# Altium PCB AQFlow_PCB.PcbDoc
Units mil, origin at the board's own origin, x right, y up, seen from the top; angles counter-clockwise.
Board outline 5485 x 2945 mil, 2 copper layers (Top Layer, Bottom Layer); 66 components, 69 nets, 294 pads, 0 vias.
Unrouted connection lines stored in the file: 113.
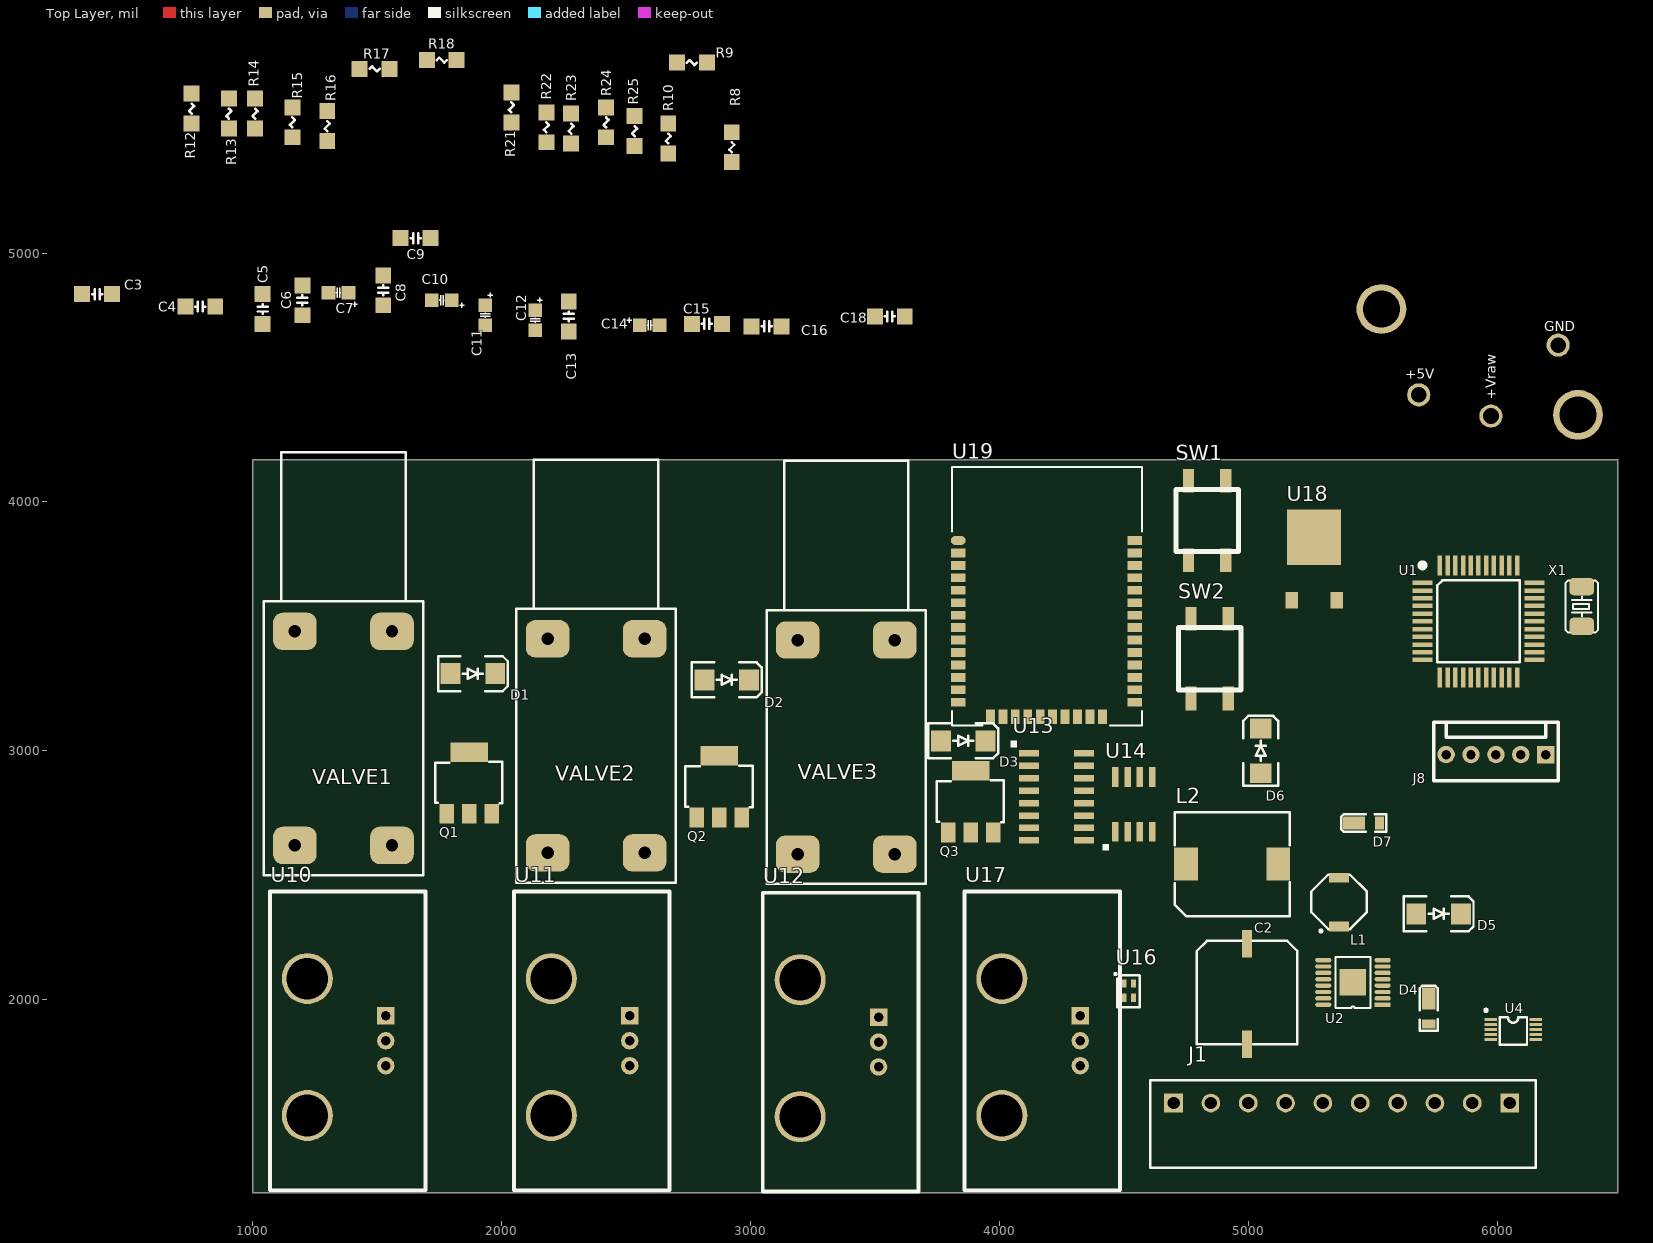
[diagram p0: Top Layer view]
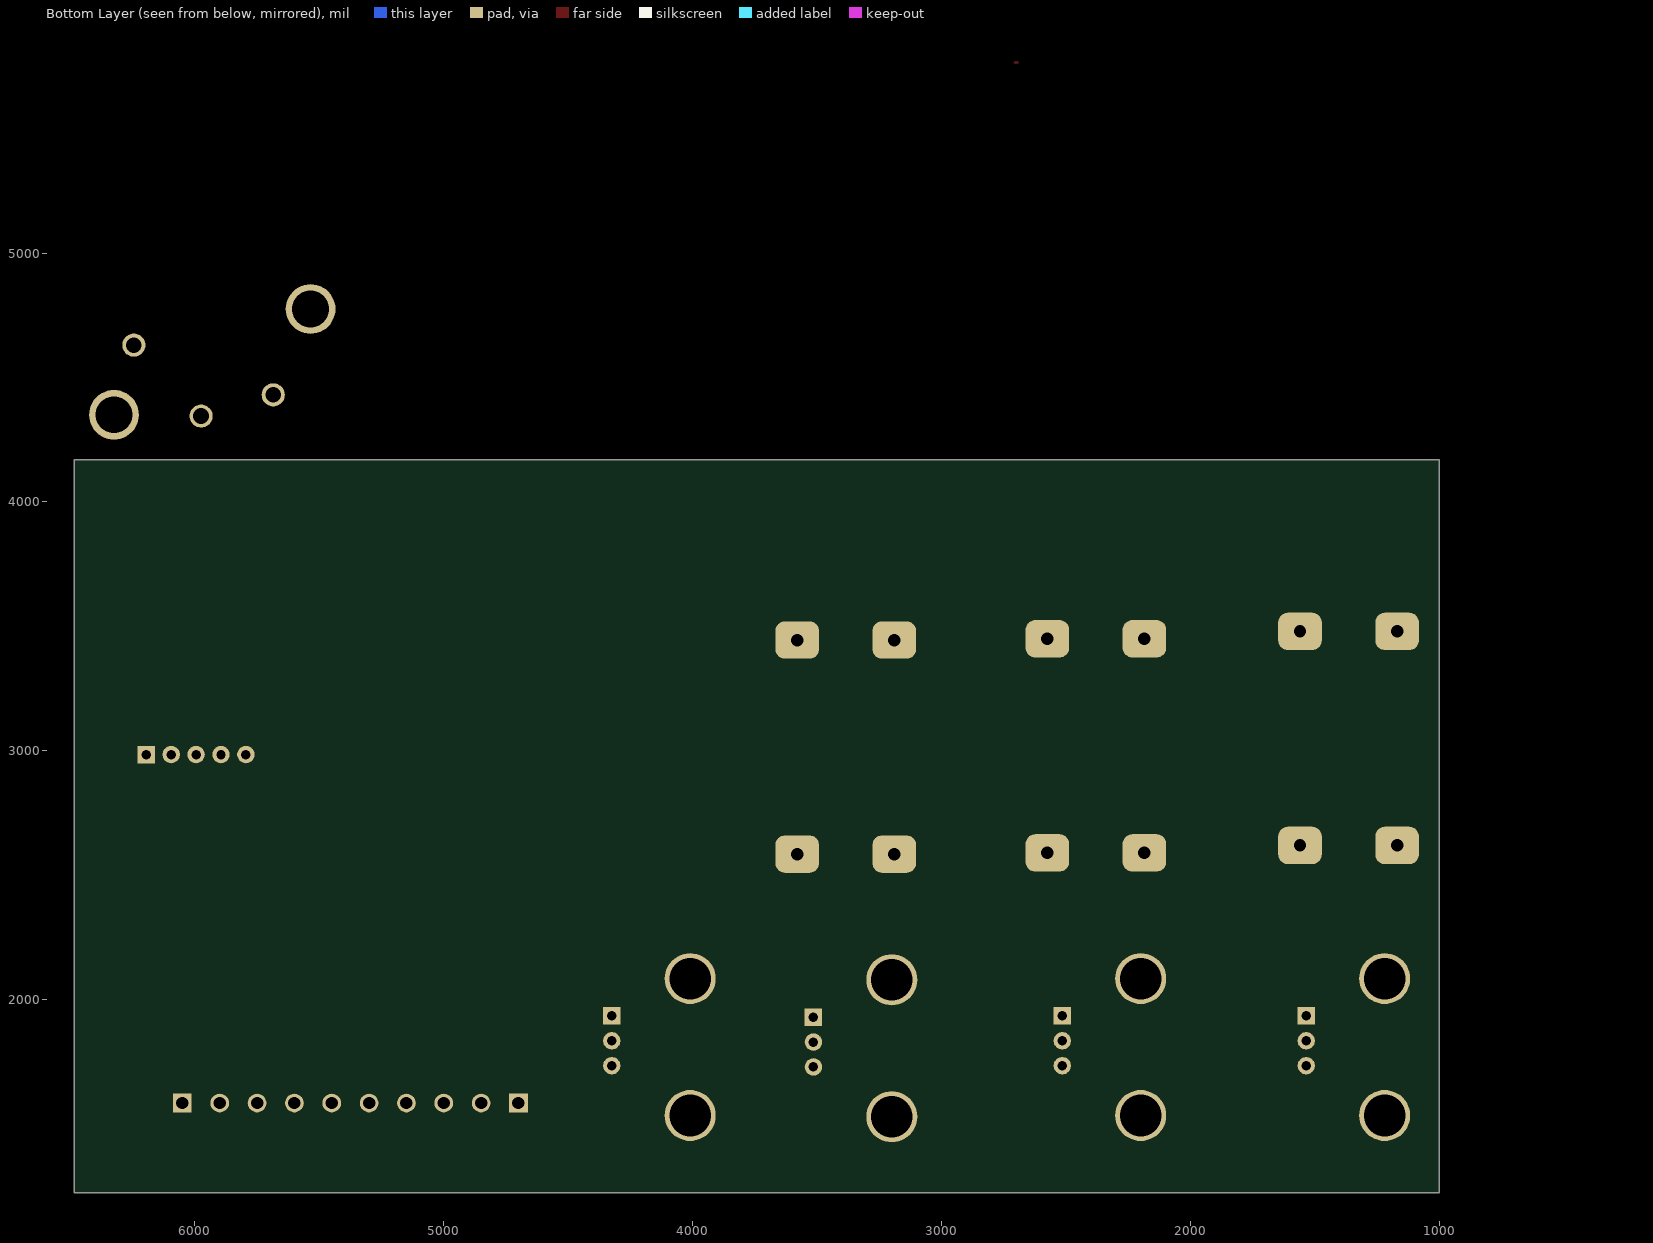
[diagram p1: Bottom Layer view, seen from below]

## Layer stack, top to bottom
Top Solder: solder mask 0.4, Solder Resist, Dk 3.5
Top Layer: signal copper 1.4
Dielectric1: dielectric 12.6, FR-4, Dk 4.8
Bottom Layer: signal copper 1.4
Bottom Solder: solder mask 0.4, Solder Resist, Dk 3.5

## Board outline
1000,1225 6485,1225 6485,4170 1000,4170

## Design rules (kind name [scope] priority, off if disabled: settings)
Clearance [All] p1: gap=6 ignorepadtopadclearanceinfootprint=FALSE except(0: Arc-Hole Track-Hole SMDPad-Hole THPad-Hole Via-Hole Fill-Hole Poly-Hole Region-Hole Text-Hole)
PolygonConnect [All] p1: connectstyle=Relief reliefconductorwidth=10 reliefentries=4 polygonreliefangle="90 Angle" airgapwidth=10
RoutingVias [All] p1: holewidth=28 width=50 viastyle="Through Hole" minholewidth=12 minwidth=30 maxholewidth=28 maxwidth=50
SolderMaskExpansion [All] p1: expansion=4 istentingtop=FALSE
Width [All] p1: maxlimit=100 minlimit=6 preferedwidth=10
30 further rules are at their usual default settings.

## Classes and differential pairs
component class BLE: R? SW1 SW2 U19 U?
component class "Valve ControlB": D1 D2 D3 Q1 Q2 Q3 R10 U10 U11 U12 U13 U14 U17 VALVE1 VALVE2 VALVE3
component class Power: +5V +Vraw C2 C3 C4 C5 C6 C7 C8 D5 D6 D7 GND J1 L1 L2 R8 R9 R12 R13 R14 R21 R22 U2 U18
component class PIC: C9 C10 C11 C12 C13 C14 C15 C16 C18 J8 R15 R16 R17 R18 R23 R24 R25 U1 U4 U16 X1

## Components (designator, comment, footprint, x,y, rotation, side; value= is the part's Value field where it differs from the comment)
+5V "+3.3V" PAD_TESTPOINT 5685,4430 r90 top
+Vraw "+Vraw" PAD_TESTPOINT 5975,4345 r90 top
C2 "CAP_POL_Alu" Cap_Alu_UCL1V221MCL6GS 4995,2225 r0 top
C3 "CC1206" CC1206 375,4835 r0 top value=4.7uF
C4 "CC1206" CC1206 790,4785 r180 top value=0.1uF
C5 "CC1206" CC1206 1040,4775 r270 top value=220pF
C6 "CC1206" CC1206 1200,4810 r90 top value=22uF
C7 "CAP_POL_0805 Generic" Cap_Pol_0805 1345,4840 r180 top
C8 "" CC1206 1525,4850 r90 top value=0.1uF
C9 "CC1206" CC1206 1655,5060 r180 top value=0.1uF
C10 "Cap_Pol_0805" Cap_Pol_0805 1760,4810 r180 top
C11 "Cap_Pol_0805" Cap_Pol_0805 1935,4750 r270 top
C12 "Cap_Pol_0805" Cap_Pol_0805 2135,4730 r270 top
C13 "CC1206" CC1206 2270,4745 r270 top value=0.1uF
C14 "CAP_POL_0805 Generic" Cap_Pol_0805 2595,4710 r0 top
C15 "CC1206" CC1206 2825,4715 r180 top value=22pF
C16 "CC1206" CC1206 3065,4705 r180 top value=22pF
C18 "CC1206" CC1206 3560,4745 r0 top value=0.1uF
D1 "DIODE_PWR" SMB_DIODE_PWR(Primary) 1885,3310 r180 top value={Value}
D2 "DIODE_PWR" SMB_DIODE_PWR(Primary) 2905,3285 r180 top value={Value}
D3 "DIODE_PWR" SMB_DIODE_PWR(Primary) 3855,3040 r180 top value={Value}
D4 "PD3S0230DICT" POWERDI123 5725,1960 r270 top
D5 "PD3S0230DICT" SMB_DIODE_PWR(Primary) 5765,2345 r180 top
D6 "DFLS230LDICT" SMB_DIODE_PWR(Primary) 5050,3000 r270 top
D7 "DFLS230LDICT" POWERDI123 5470,2710 r0 top
GND "GND" PAD_TESTPOINT 6244.99,4630 r90 top
J1 "TERM_BLOCK_10" "Terminal Block 10 Pos" 4700,1585 r0 top
J8 "HDR_MTA_5X100" HDR_MTA_5X100 6045,2985 r0 top
L1 "Inductor" Inductor_Small 5365,2295 r90 top value=3.3uH
L2 "Inductor" 7447798111 4750,2545 r0 top value=11uH
Q1 "ZVN4306" "TO-261-4 - ZVN4306GCT" 1960.55,2746.97 r180 top value={Value}
Q2 "ZVN4306" "TO-261-4 - ZVN4306GCT" 2965.55,2731.97 r180 top value={Value}
Q3 "ZVN4306" "TO-261-4 - ZVN4306GCT" 3975.55,2671.97 r180 top value={Value}
R8 "RC1206" RC1206 2925,5425 r90 top value=10k
R9 "RC1206" RC1206 2765,5765 r180 top value=100k
R10 "RC1206" RC1206 2670,5460 r270 top value=10k
R12 "RC1206" RC1206 755,5580 r90 top value=31.6k
R13 "RC1206" RC1206 905,5560 r270 top value=10k
R14 "RC1206" RC1206 1010,5560 r270 top value=10k
R15 "RC1206" RC1206 1160,5525 r270 top value=0
R16 "RC1206" RC1206 1300,5510 r270 top value=0
R17 "RC1206" RC1206 1490,5740 r180 top value=100
R18 "RC1206" RC1206 1760,5775 r0 top value=10k
R21 "RC1206" RC1206 2040,5585 r270 top value=10k
R22 "RC1206" RC1206 2180,5505 r270 top value=120k
R23 "RC1206" RC1206 2280,5500 r270 top value=1k
R24 "RC1206" RC1206 2420,5525 r270 top value=1k
R25 "RC1206" RC1206 2535,5490 r270 top value=1k
SW1 "SW_STMW_660" SW_STMW_660 4835,3925 r0 top
SW2 "SW_STMW_660" SW_STMW_660 4845,3370 r0 top
U1 "PIC18F47J53" 44-TQFP 5925,3520 r180 top
U2 "LT3506" "TSSOP16 Bottom Pad" 5530,1980 r180 top
U4 "Max 3313" uSOP 5955,1920 r0 top
U10 "AWM3000FM_1" AWM3000FM 1535,1835 r90 top
U11 "AWM3000FM_2" AWM3000FM 2515,1835 r90 top
U12 "AWM3000FM_3" AWM3000FM 3515,1830 r90 top
U13 "CD4051" SO16 4120,2990 r0 top
U14 "TLC2262" SO8 4465,2675 r90 top
U16 "RGB-LED_LITE-ON" LTST-C19HE1WT 4500,2065 r0 top
U17 "AWM3000FM_4" AWM3000FM 4325,1835 r90 top
U18 "LP2950_FLAT" TO-252 5175,3605 r0 top
U19 "ESP-WROOM-32" ESP-WROOM-32 3835,3845 r0 top
VALVE1 "SOLENOID_VALVE" SOLENOID_VALVE 1365,3050 r270 top
VALVE2 "SOLENOID_VALVE" SOLENOID_VALVE 2380,3020 r270 top
VALVE3 "SOLENOID_VALVE" SOLENOID_VALVE 3385,3015 r270 top
X1 "12MHz" XTAL_MINI_ABM3 6340,3580 r270 top

## Footprints (in the part's own frame and the unit in brackets; to place one, negate y for a bottom-side part, rotate by r counter-clockwise, add the part's x,y. Pads: shape width x height; smd on the part's side, far side on the other; paste and mask are expansions set on the pad)
44-TQFP [mil]
  rect 80x18 smd: 1(225,-155) 2(225,-124) 3(225,-93) 4(225,-62) 5(225,-31) 6(225,0) 7(225,31) 8(225,62) 9(225,93) 10(225,124) 11(225,155) 23(-225,155) 24(-225,124) 25(-225,93) 26(-225,62) 27(-225,31) 28(-225,0) 29(-225,-31) 30(-225,-62) 31(-225,-93) 32(-225,-124) 33(-225,-155)
  rect 18x80 smd: 12(155,225) 13(124,225) 14(93,225) 15(62,225) 16(31,225) 17(0,225) 18(-31,225) 19(-62,225) 20(-93,225) 21(-124,225) 22(-155,225) 34(-155,-225) 35(-124,-225) 36(-93,-225) 37(-62,-225) 38(-31,-225) 39(0,-225) 40(31,-225) 41(62,-225) 42(93,-225) 43(124,-225) 44(155,-225)
  silkscreen extent -165,-235 235,165
7447798111 [mm] "Inductor for 10.5V line"
  rect 2.4x3.4 smd: 1(0,0) 2(9.398,0)
  silkscreen extent -1.17,-5.31 10.59,5.31
AWM3000FM [mil]
  round 70 hole 38: 1(-100,0) 2(0,0)
  rect 70x70 hole 38: 3(100,0)
  round 205 hole 167: 4(-300,315) 5(250,315)
  silkscreen extent -600,-160 600,465
Cap_Alu_UCL1V221MCL6GS [mil]
  rect 39.37x110 smd: minus(0,-404) plus(0,0)
  silkscreen extent -202,-404 202,12
Cap_Pol_0805 [mil]
  rect 55x55 smd: minus(40,0) plus(-40,0)
  silkscreen extent -75,-20 10,55
CC1206 [mil]
  rect 64x64 smd: 1(-60,0) 2(60,0)
  silkscreen extent -20,-20 20,20
ESP-WROOM-32 [mm]
  oval 1.5x0.9 smd: 1(0,0)
  rect 1.5x0.9 smd: 2(0,-1.27) 3(0,-2.54) 4(0,-3.81) 5(0,-5.08) 6(0,-6.35) 7(0,-7.62) 8(0,-8.89) 9(0,-10.16) 10(0,-11.43) 11(0,-12.7) 12(0,-13.97) 13(0,-15.24) 14(0,-16.51) 25(18,-16.51) 26(18,-15.24) 27(18,-13.97) 28(18,-12.7) 29(18,-11.43) 30(18,-10.16) 31(18,-8.89) 32(18,-7.62) 33(18,-6.35) 34(18,-5.08) 35(18,-3.81) 36(18,-2.54) 37(18,-1.27) 38(18,0)
  rect 0.9x1.5 smd: 15(3.28,-18) 16(4.55,-18) 17(5.82,-18) 18(7.09,-18) 19(8.36,-18) 20(9.63,-18) 21(10.9,-18) 22(12.17,-18) 23(13.44,-18) 24(14.71,-18)
  Top Overlay keep-out region: 5.7,-6 9.2,-6 9.2,-9.5 5.7,-9.5
  silkscreen extent -0.65,-18.86 18.75,7.5
HDR_MTA_5X100 [mil]
  rect 70x70 hole 38: 1(150,0)
  round 70 hole 38: 2(50,0) 3(-50,0) 4(-150,0) 5(-250,0)
  silkscreen extent -300,-105 200,130
Inductor_Small [mil]
  rect 40x80 smd: 1(0,0) 2(195,0)
  silkscreen extent -24,-112 208,112
LTST-C19HE1WT [mil] "LED RGB CHIP SMD"
  rect 20x33.5 smd: 1(0,0) 2(40,0) 3(40,-57.5) 4(0,-57.5)
  silkscreen extent -37,-96 65,42
PAD_TESTPOINT [mil]
  round 93 hole 63: TP(0,0)
POWERDI123 [mil]
  rect 36x54 smd: A(58,0)
  rect 90x54 smd: K(-45,0)
  silkscreen extent -97,-36 84,36
RC1206 [mil]
  rect 64x64 smd: 1(-60,0) 2(60,0)
  silkscreen extent -20,-10 20,10
SMB_DIODE_PWR(Primary) [mil]
  rect 80x85 smd: A(90,0) K(-90,0)
  silkscreen extent -140,-70 140,70
SO8 [mil]
  rect 80x26 smd: 1(0,0) 2(0,-50) 3(0,-100) 4(0,-150) 5(220,-150) 6(220,-100) 7(220,-50) 8(220,0)
  silkscreen extent -75,25 -50,50
SO16 [mil]
  rect 80x26 smd: 1(0,0) 2(0,-50) 3(0,-100) 4(0,-150) 5(0,-200) 6(0,-250) 7(0,-300) 8(0,-350) 9(220,-350) 10(220,-300) 11(220,-250) 12(220,-200) 13(220,-150) 14(220,-100) 15(220,-50) 16(220,0)
  silkscreen extent -75,25 -50,50
SOLENOID_VALVE [mil]
  rrect50% 150x175 hole 50: 1(430,195) 2(430,-195) 3(-430,195) 4(-430,-195)
  silkscreen extent -1150,-320 550,320, body extent -1153,-325 551,324, height 700
SW_STMW_660 [mil]
  rect 45x95 smd: 1(-75,-160) 2(75,-160) 3(75,160) 4(-75,160)
  silkscreen extent -125,-125 125,125
"Terminal Block 10 Pos" [mil]
  rect 75x75 hole 50: 1(0,0) 10(1350,0)
  round 75 hole 50: 2(150,0) 3(300,0) 4(450,0) 5(600,0) 6(750,0) 7(900,0) 8(1050,0) 9(1200,0)
  silkscreen extent -93,-261 1456,92, body extent -96,-272 1458,94, height 114
TO-252 [mil]
  rect 51x67 smd: 1(0,0) 3(180,0)
  rect 217x224 smd: 2(90,253)
"TO-261-4 - ZVN4306GCT" [mm]
  rect 1.5x2 smd: D(2.3,0) G(4.6,0) S(0,0)
  rect 3.8x2 smd: D(2.3,-6.3)
  silkscreen extent -1.09,-5.31 5.77,-1.07
"TSSOP16 Bottom Pad" [mm]
  rect 1.651x0.45 smd: 1(-0.254,0)
  oval 1.651x0.45 smd: 2(-0.254,-0.65) 3(-0.254,-1.3) 4(-0.254,-1.95) 5(-0.254,-2.6) 6(-0.254,-3.25) 7(-0.254,-3.9) 8(-0.254,-4.55) 9(5.804,-4.55) 10(5.804,-3.9) 11(5.804,-3.25) 12(5.804,-2.6) 13(5.804,-1.95) 14(5.804,-1.3) 15(5.804,-0.65) 16(5.804,0)
  rect 2.74x2.74 smd: 17(2.794,-2.286)
  silkscreen extent 0.99,-4.88 4.57,0.33
uSOP [mil]
  rect 50x11.81 smd: 1(20,0) 2(20,-20) 3(20,-40) 4(20,-60) 5(20,-80) 6(200,-80) 7(200,-60) 8(200,-40) 9(200,-20) 10(200,0)
  silkscreen extent -6,-100 165,43
XTAL_MINI_ABM3 [mil]
  rrect50% 70x100 smd paste+1.97 mask+1.97: 1(-80,0) 2(80,0)
  silkscreen extent -105,-65 105,65

## Part data
+5V +Vraw GND: library part PAD, "Test Point"
C2: Capacitance=220µF, ESR (Equivalent Series Resistance)=-, Lifetime @ Temp.="2000 Hrs @ 105°C", Manufacturer=Nichicon, Manufacturer Part Number=UCL1V221MCL6GS, Operating Temperature="-55°C ~ 105°C", Package / Case="Radial, Can - SMD", Ripple Current=850mA, Supplier Part Number 1=493-3958-1-ND, Tolerance=±20%, Voltage Rating=35V, Applications="General Purpose", Category=Capacitors, ComponentLink1Description=http://nichicon-us.com/english/products/pdfs/e-cl.pdf, ComponentLink1URL=http://nichicon-us.com/english/products/pdfs/e-cl.pdf, Height - Seated (Max)="0.303\" (7.70mm)", Impedance="100 mOhm", Lead Spacing=-, Mounting Type="Surface Mount", Packaging="Cut Tape (CT)", Pricing 1="1=1.15, 10=0.962, 25=0.8292, 50=0.7778, 100=0.6141, 250=0.51176 (USD)", RoHS="RoHS Compliant", Size / Dimension="0.394\" Dia (10.00mm)", Stock 1=6274, Supplier 1=Digi-Key, Surface Mount Land Size="0.406\" L x 0.406\" W (10.30mm x 10.30mm)", Type=-
C7 C14: Capacitance=10µF, ESR (Equivalent Series Resistance)="6 Ohm", Lifetime @ Temp.=-, Manufacturer="Rohm Semiconductor", Manufacturer Part Number=TCTP1C106M8R, Manufacturer Size Code=P, Operating Temperature="-55°C ~ 125°C", Package / Case="0805 (2012 Metric)", Supplier Part Number 1=511-1683-2-ND, Tolerance=±20%, Voltage - Rated=16V, Category=Capacitors, ComponentLink1Description=http://rohmfs.rohm.com/en/products/databook/datasheet/passive/tantalum_capacitor/tantalum_chip_capacitor/tct_p.pdf, ComponentLink1URL=http://rohmfs.rohm.com/en/products/databook/datasheet/passive/tantalum_capacitor/tantalum_chip_capacitor/tct_p.pdf, Features="General Purpose", Height - Seated (Max)="0.047\" (1.20mm)", Lead Spacing=-, Mounting Type="Surface Mount", Packaging="Tape & Reel (TR)", Pricing 1="3000=0.2055, 6000=0.1918, 9000=0.18495, 15000=0.18221, 30000=0.1781, 75000=0.17468, 150000=0.16783 (USD)", RoHS="RoHS Compliant", Size / Dimension="0.079\" L x 0.049\" W (2.00mm x 1.25mm)", Stock 1=99000, Supplier 1=Digi-Key, Type=Molded
C8: library part CC1206, "CC1206"
C10 C11 C12: Capacitance=2.2µF, ESR (Equivalent Series Resistance)="6 Ohm", Lifetime @ Temp.=-, Manufacturer="AVX Corporation", Manufacturer Part Number=TAJR225K020RNJ, Manufacturer Size Code=R, Operating Temperature="-55°C ~ 125°C", Package / Case="0805 (2012 Metric)", Supplier Part Number 1=478-4693-1-ND, Tolerance=±10%, Voltage - Rated=20V, Category=Capacitors, ComponentLink1Description=http://www.avx.com/docs/Catalogs/tajlp.pdf, ComponentLink1URL=http://www.avx.com/docs/Catalogs/tajlp.pdf, Features="General Purpose", Height - Seated (Max)="0.047\" (1.20mm)", Lead Spacing=-, Mounting Type="Surface Mount", Packaging="Cut Tape (CT)", Pricing 1="1=1.24, 10=1.034, 100=0.66, 250=0.55, 500=0.495, 1000=0.451 (USD)", RoHS="RoHS Compliant", Size / Dimension="0.081\" L x 0.051\" W (2.05mm x 1.30mm)", Stock 1=9954, Supplier 1=Digi-Key, Type=Molded
D4 D5: Capacitance @ Vr, F="10.7pF @ 1V, 1MHz", Current - Average Rectified (Io)="200mA (DC)", Current - Reverse Leakage @ Vr="2µA @ 25V", Manufacturer="Diodes Incorporated", Manufacturer Part Number=PD3S0230-7, Operating Temperature - Junction="-65°C ~ 125°C", Package / Case="PowerDI™ 323", Supplier Part Number 1=PD3S0230DIDKR-ND, Voltage - DC Reverse (Vr) (Max)=30V, Voltage - Forward (Vf) (Max) @ If="800mV @ 100mA", Category="Discrete Semiconductor Products", ComponentLink1Description=http://www.diodes.com/datasheets/ds30722.pdf, ComponentLink1URL=http://www.diodes.com/datasheets/ds30722.pdf, Diode Type=Schottky, Mounting Type="Surface Mount", Packaging=Digi-Reel®, Pricing 1="1=0.49, 10=0.412, 25=0.3612, 100=0.309, 250=0.268, 500=0.227, 1000=0.175 (USD)", Reverse Recovery Time (trr)=5ns, RoHS="RoHS Compliant", Speed="Small Signal =< 200mA (Io), Any Speed", Stock 1=4247, Supplier 1=Digi-Key, Supplier Device Package="PowerDI™ 323"
D6 D7: Capacitance @ Vr, F="76pF @ 10V, 1MHz", Current - Average Rectified (Io)=2A, Current - Reverse Leakage @ Vr="1mA @ 30V", Manufacturer="Diodes Incorporated", Manufacturer Part Number=DFLS230L-7, Operating Temperature - Junction="-40°C ~ 125°C", Package / Case=POWERDI®123, Supplier Device Package="PowerDI™ 123", Supplier Part Number 1=DFLS230LDIDKR-ND, Voltage - DC Reverse (Vr) (Max)=30V, Voltage - Forward (Vf) (Max) @ If="420mV @ 2A", Category="Discrete Semiconductor Products", ComponentLink1Description=http://www.diodes.com/datasheets/ds30515.pdf, ComponentLink1URL=http://www.diodes.com/datasheets/ds30515.pdf, Diode Type=Schottky, Mounting Type="Surface Mount", Packaging=Digi-Reel®, Pricing 1="1=0.74, 10=0.65, 25=0.5744, 100=0.5004, 250=0.4356, 500=0.3708, 1000=0.297 (USD)", Reverse Recovery Time (trr)=-, RoHS="RoHS Compliant", Speed="Fast Recovery =< 500ns, > 200mA (Io)", Stock 1=8959, Supplier 1=Digi-Key
L1: Current - Saturation=2.1A, Current Rating=2.01A, DC Resistance (DCR)="45 mOhm Max", Frequency - Self Resonant=-, Frequency - Test=100kHz, Inductance=4.7µH, Manufacturer="Eaton Bussmann", Manufacturer Part Number="EATON SD53-3R3-R", Operating Temperature="-40°C ~ 125°C", Package / Case=Nonstandard, Supplier Part Number 1=513-1455-1-ND, Tolerance=±20%, Category="Inductors, Coils, Chokes", ComponentLink1Description=http://www.cooperindustries.com/content/dam/public/bussmann/Electronics/Resources/product-datasheets/Bus_Elx_DS_PM-4149_SD53_Series.pdf, ComponentLink1URL=http://www.cooperindustries.com/content/dam/public/bussmann/Electronics/Resources/product-datasheets/Bus_Elx_DS_PM-4149_SD53_Series.pdf, Height - Seated (Max)="0.118\" (3.00mm)", Material - Core=Ferrite, Mounting Type="Surface Mount", Packaging="Cut Tape (CT)", Pricing 1="1=1.48, 10=1.388, 50=1.11, 100=1.0545, 500=0.851, 1000=0.777 (USD)", Q @ Freq=-, RoHS="RoHS Compliant", Shielding=Shielded, Size / Dimension="0.204\" L x 0.204\" W (5.20mm x 5.20mm)", Stock 1=2548, Supplier 1=Digi-Key, Supplier Device Package=-, Type=Wirewound
L2: Current - Saturation=5.3A, Current Rating=6.9A, DC Resistance (DCR)="15.8 mOhm Max", Frequency - Self Resonant=25MHz, Frequency - Test=100kHz, Inductance=11µH, Manufacturer="Wurth Electronics Inc", Manufacturer Part Number=7447798111, Operating Temperature="-40°C ~ 150°C", Package / Case=Nonstandard, Q @ Freq=-, Supplier Part Number 1=732-2414-2-ND, Tolerance=±20%, Category="Inductors, Coils, Chokes", ComponentLink1Description=http://katalog.we-online.de/pbs/datasheet/7447798111.pdf, ComponentLink1URL=http://katalog.we-online.de/pbs/datasheet/7447798111.pdf, Height - Seated (Max)="0.252\" (6.40mm)", Material - Core="Metal Composite", Mounting Type="Surface Mount", Packaging="Tape & Reel (TR)", Pricing 1="500=2.49374 (USD)", RoHS="RoHS Compliant", Shielding=Shielded, Size / Dimension="0.402\" L x 0.402\" W (10.20mm x 10.20mm)", Stock 1=500, Supplier 1=Digi-Key, Supplier Device Package=-, Type=Wirewound
U1: "PIC uController", Manufacturer="Microchip Technology", Manufacturer Part Number=PIC18F47J53T-I/PT, Operating Temperature="-40°C ~ 85°C", Package / Case=44-TQFP, Supplier Device Package="44-TQFP (10x10)", Supplier Part Number 1=PIC18F47J53T-I/PT-ND, Voltage - Supply (Vcc/Vdd)="2.15 V ~ 3.6 V", Category="Integrated Circuits (ICs)", ComponentLink1Description=http://www.microchip.com/mymicrochip/filehandler.aspx?ddocname=en548986, ComponentLink1URL=http://www.microchip.com/mymicrochip/filehandler.aspx?ddocname=en548986, Connectivity="I²C, LIN, SPI, UART/USART, USB", Core Processor=PIC, Core Size=8-Bit, Data Converters="A/D 13x10b/12b", EEPROM Size=-, Number of I/O=34, Oscillator Type=Internal, Packaging="Tape & Reel (TR)", Peripherals="Brown-out Detect/Reset, POR, PWM, WDT", Pricing 1="1200=3.42999 (USD)", Program Memory Size="128KB (64K x 16)", Program Memory Type=FLASH, RAM Size="3.8K x 8", RoHS="RoHS Compliant", Speed=48MHz, Stock 1=0, Supplier 1=Digi-Key
U2: Current - Output=1.6A, Frequency - Switching=1.1MHz, Manufacturer="Linear Technology", Manufacturer Part Number=LT3506AEFE#PBF, Operating Temperature="-40°C ~ 85°C", Package / Case="16-TSSOP (0.173\", 4.40mm Width) Exposed Pad", Supplier Device Package=16-TSSOP-EP, Supplier Part Number 1=LT3506AEFE#PBF-ND, Voltage - Input="3.6 V ~ 25 V", Voltage - Output="0.8 V ~ 22 V", Category="Integrated Circuits (ICs)", ComponentLink1Description=http://www.linear.com/docs/16297, ComponentLink1URL=http://www.linear.com/docs/16297, Mounting Type="Surface Mount", Number of Outputs=2, Output Type=Adjustable, Packaging=Tube, Pricing 1="1=6.13, 25=4.36, 100=3.59 (USD)", RoHS="RoHS Compliant", Stock 1=337, Supplier 1=Digi-Key, Synchronous Rectifier=No, Type="Step-Down (Buck)"
U4: Supplier Part Number 1=MAX3313CUB+-ND, Supplier 1=Digi-Key
U10: "AWM3000FM"
U11 U12 U17: library part AWM3000FM_1, "AWM3000FM"
U14: "Low Power Low Offset Voltage Dual Comparators"
U19: "TXRX MOD BLE WIFI ESP-WROOM-32", Digikey PN=1528-1801-ND
X1: library part XTAL_MINI_ABM3

## Free pads (board coordinates)
  round 200 hole 148: MH(5535,4775) MH(6325,4350)

## Nets (pads, with @x,y where several pads share a name; then routed paths per layer and width w, separated by ;. In a path a pad name is that pad's centre, name@x,y a point inside that pad or via, vN(x,y) a via of type N, cw(c..) or ccw(c..) an arc to the next point about the centre after c; other vN are vias at no path point)
10.5V: D1.K D2.K D3.K U10.2 U11.2 U12.2 U17.2 U18.1 VALVE1.2 VALVE2.2 VALVE3.2
+3.3V: +5V.TP C6.1 C7.plus C9.1 C18.1 D4.A J8.1 L1.1 R12.1 R18.1 U1.7 U1.22 U1.28 U13.16 U14.8 U16.4 U19.2
+5V: C12.plus C13.1 U4.1 U18.3
+VRAW: +Vraw.TP C2.plus C3.1 J1.1 R9.1 U2.3 U2.4 U2.5 U2.6
ESP_enable: SW1.2 U19.3
ESP_Io: SW2.2 U19.25
FLOW_1: R10.2 U13.14
FLOW_2: U13.15
FLOW_3: U13.12
FLOW_4: U13.1
GND: SW1.1 SW2.1 U19.1 U19.15 U19.38
GND: C2.minus C3.2 C6.2 C7.minus C8.2 C9.2 C11.plus C12.minus C13.2 C14.minus C15.1 C16.1 C18.2 D6.A D7.A GND.TP J1.2 J1.10 J8.2 J8.5 pad.MH Q1.S Q2.S Q3.S R8.2 R13.2 R14.2 R18.2 R21.2 U1.6 U1.21 U1.29 U2.17 U4.10 U10.3 U11.3 U12.3 U13.6 U13.7 U13.8 U14.4 U17.3 U18.2
Net+10.5V_TP: D5.A L2.1 R22.2
NetC4_1: C4.1 D7.K L1.2 U2.2
NetC4_2: C4.2 D4.K U2.1
NetC5_1: C5.1 R14.1
NetC5_2: C5.2 U2.15
NetC8_1: C8.1 U2.13
NetC10_minus: C10.minus U4.2
NetC10_plus: C10.plus U4.9
NetC11_minus: C11.minus U4.8
NetC14_plus: C14.plus U1.23
NetC15_2: C15.2 R17.1 X1.1
NetC16_2: C16.2 U1.30 X1.2
NetC20_1: U2.12
NetC21_1: 
NetC21_2: U2.10
NetC22_1: D6.K L2.2 U2.7
NetC22_2: D5.K U2.8
NetD1_A: D1.A Q1.D VALVE1.1
NetD2_A: D2.A Q2.D VALVE2.1
NetD3_A: D3.A Q3.D VALVE3.1
NetJ1_3: J1.3 U4.7
NetJ1_4: J1.4 U4.6
NetJ1_5: J1.5 U1.9
NetJ1_6: J1.6 U1.8
NetJ1_7: J1.7 R15.1 U1.1
NetJ1_8: J1.8 R16.1 U1.44
NetJ8_3: J8.3 U1.17
NetJ8_4: J8.4 U1.16
NetQ1_G: Q1.G U1.11
NetQ2_G: Q2.G U1.14
NetQ3_G: Q3.G U1.15
NetR2_1: U17.1
NetR3_1: U12.1
NetR6_1: U11.1
NetR8_1: R8.1 R9.2 U1.19 | length 10
  Top Layer w12: R9.2@2695,5765 R9.2
NetR10_1: R10.1 U10.1
NetR12_2: R12.2 R13.1 U2.16
NetR15_2: R15.2 U4.5
NetR16_2: R16.2 U4.4
NetR17_2: R17.2 U1.31
NetR19_2: U1.18
NetR21_1: R21.1 R22.1 U2.9
NetR23_1: R23.1 U1.41
NetR23_2: R23.2 U16.1
NetR24_1: R24.1 U1.2
NetR24_2: R24.2 U16.2
NetR25_1: R25.1 U1.3
NetR25_2: R25.2 U16.3
NetU1_25: U1.25 U13.11
NetU1_26: U1.26 U13.10
NetU1_27: U1.27 U13.9
NetU1_32: U1.32 U19.29
NetU1_35: U1.35 U19.26
NetU1_38: U1.38
NetU1_39: U1.39
NetU13_3: U13.3 U14.3
NetU14_1: U14.1 U14.2
pads on no net: J1.9 SW1.3 SW1.4 SW2.3 SW2.4 U1.4 U1.5 U1.10 U1.12 U1.13 U1.20 U1.24 U1.33 U1.34 U1.36 U1.37 U1.40 U1.42 U1.43 U2.11 U2.14 U4.3 U10.4 U10.5 U11.4 U11.5 U12.4 U12.5 U13.2 U13.4 U13.5 U13.13 U14.5 U14.6 U14.7 U17.4 U17.5 U19.4 U19.5 U19.6 U19.7 U19.8 U19.9 U19.10 U19.11 U19.12 U19.13 U19.14 U19.16 U19.17 U19.18 U19.19 U19.20 U19.21 U19.22 U19.23 U19.24 U19.27 U19.28 U19.30 U19.31 U19.32 U19.33 U19.34 U19.35 U19.36 U19.37 VALVE1.3 VALVE1.4 VALVE2.3 VALVE2.4 VALVE3.3 VALVE3.4

## Dimensions
1000,1225 to 6485,1225 on Mechanical 1
1000,1225 to 1000,4170 on Mechanical 1